# Altium PCB 004-H-01 SD data logger.PcbDoc
Units mm, origin at the board's own origin, x right, y up, seen from the top; angles counter-clockwise.
Board outline 101 x 61 mm, 2 copper layers (Top Layer, Bottom Layer), stack 1.621 mm thick; 91 components, 66 nets, 324 pads, 153 vias.
Unrouted connection lines stored in the file: 79.
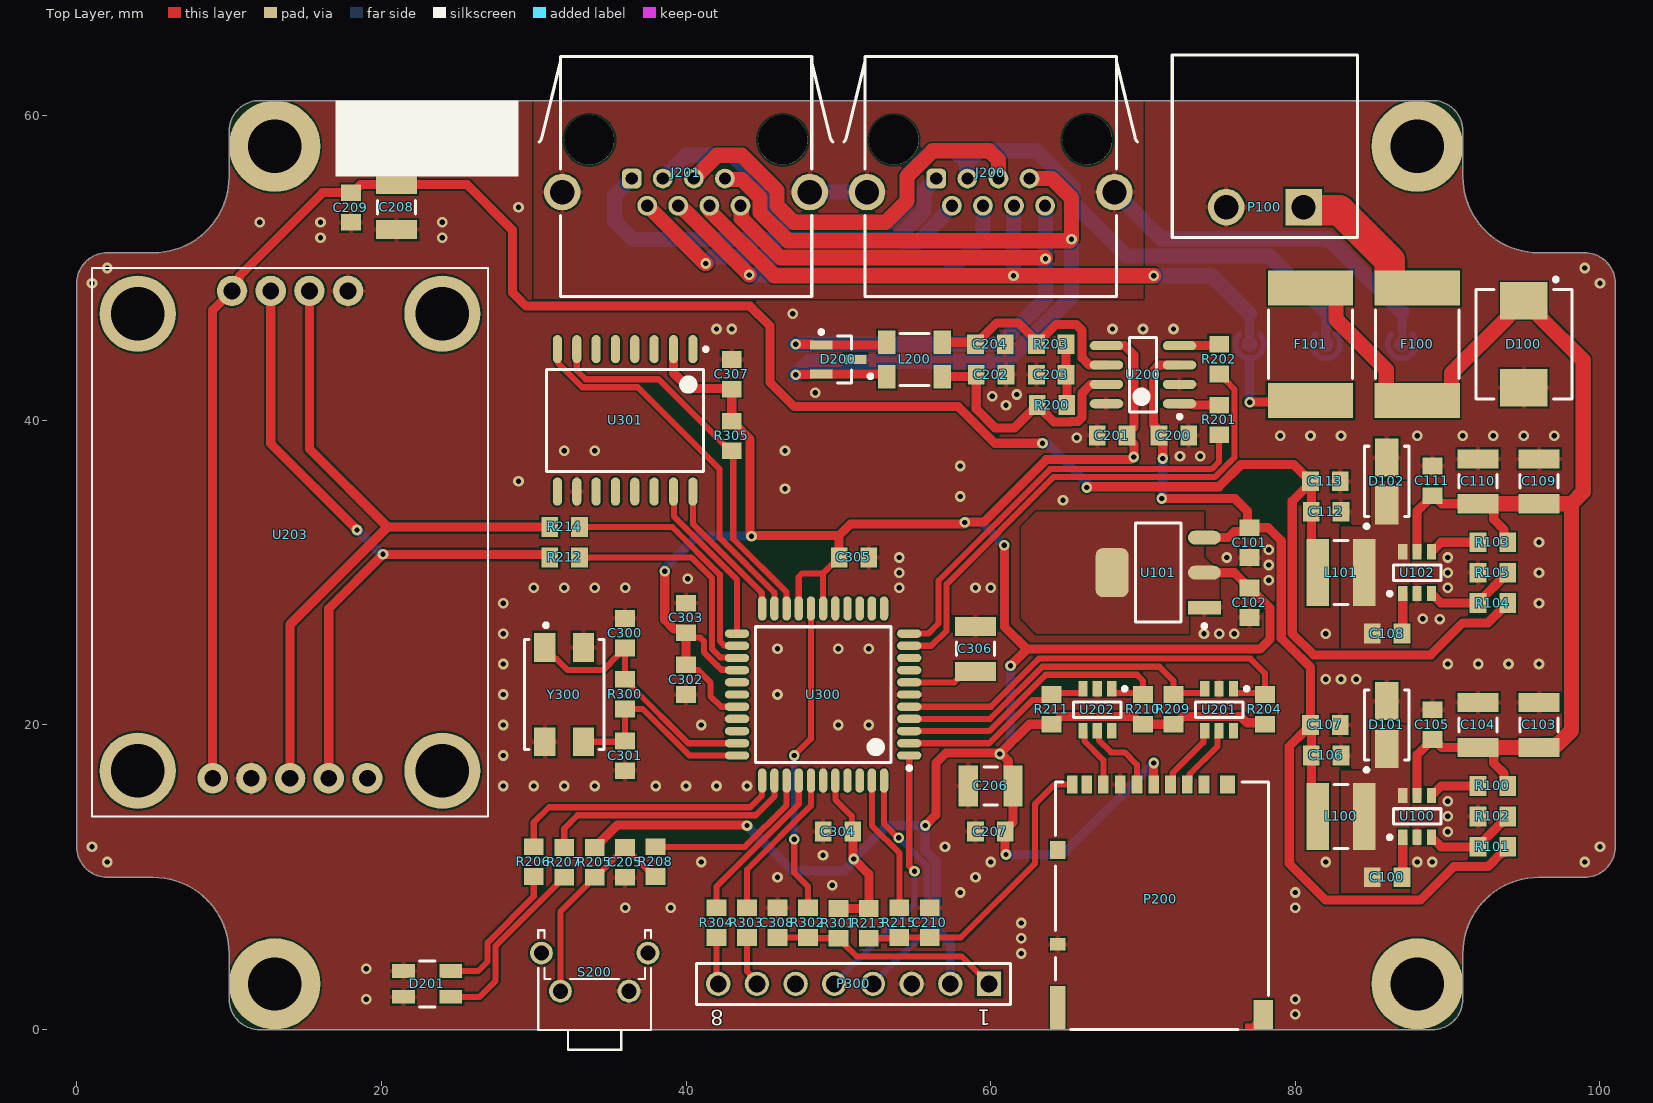
[diagram p0: Top Layer view]
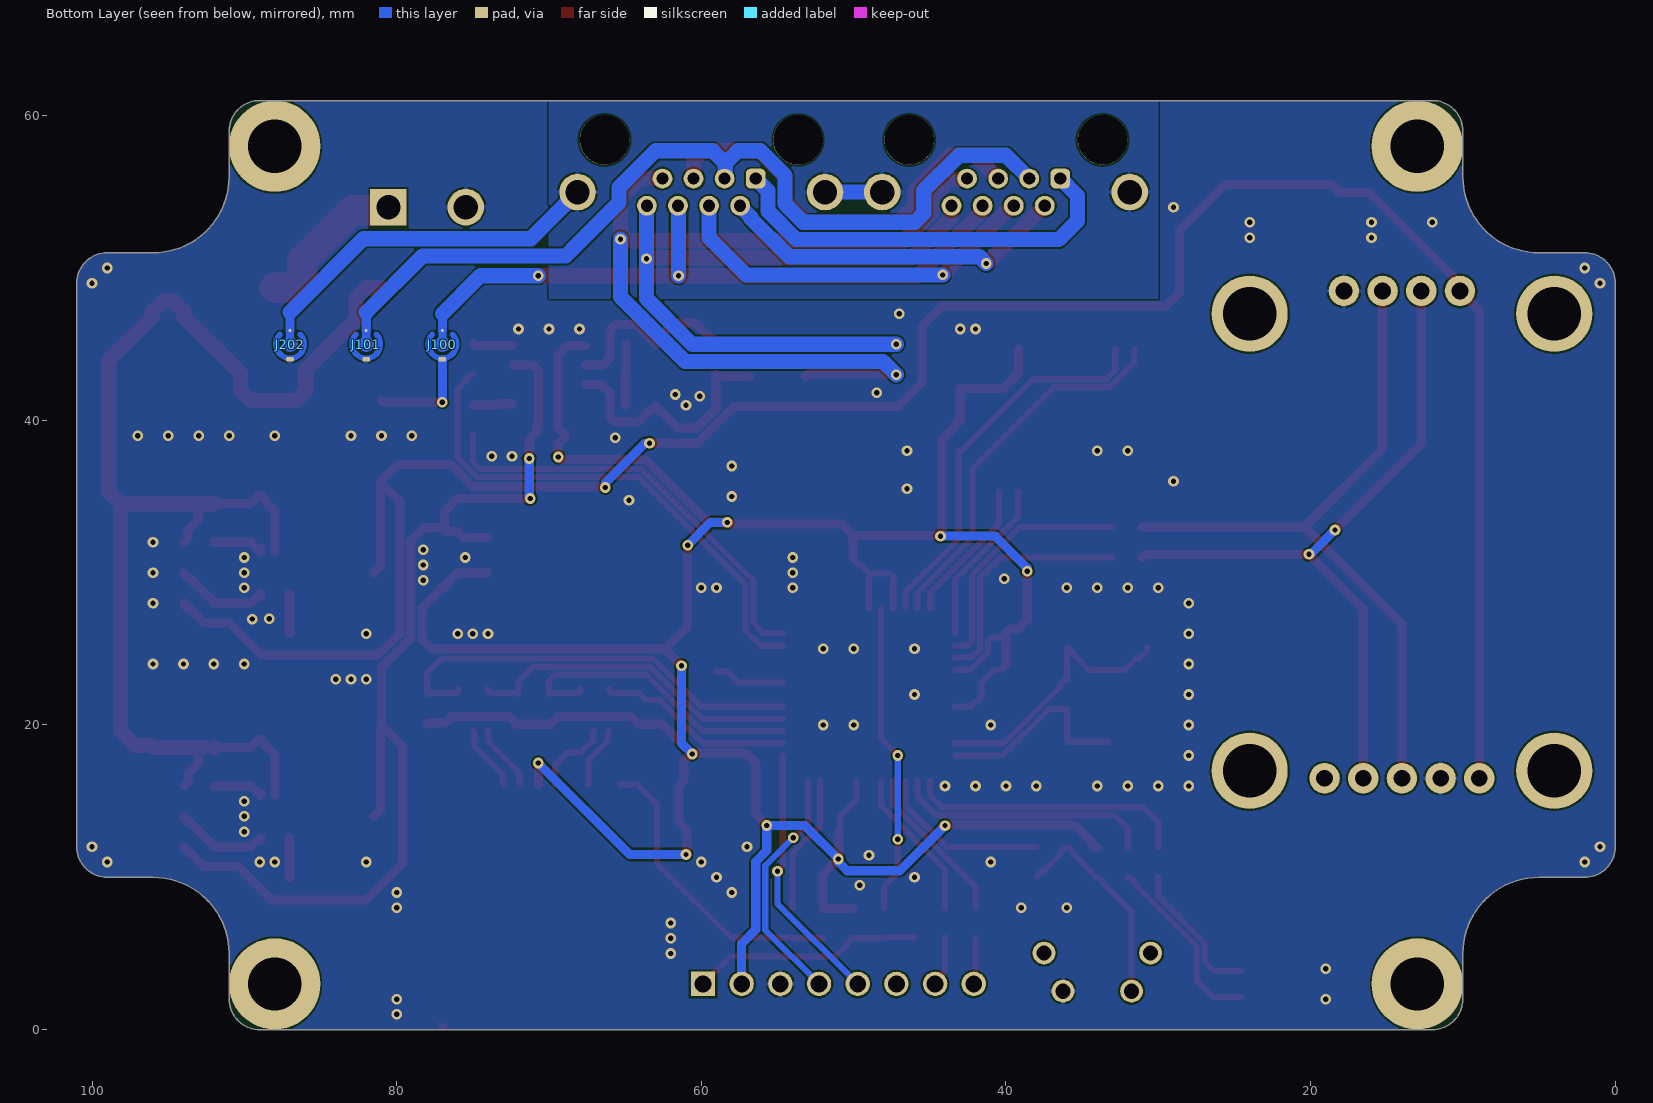
[diagram p1: Bottom Layer view, seen from below]
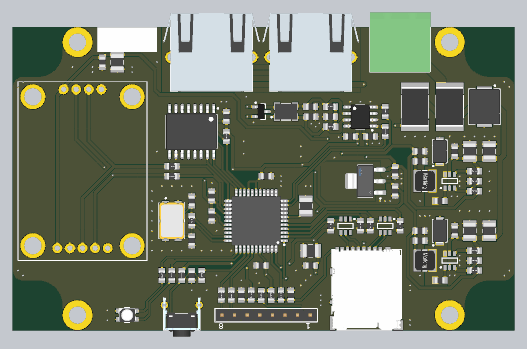
[diagram p2: 3D render of the assembled board from above, using the file's embedded part models]

## Layer stack, top to bottom
Top Solder: solder mask 0.0102, Solder Resist, Dk 3.5
Top Layer: signal copper 0.0356
Dielectric 1: dielectric 1.55, FR-4, Dk 4.8
Bottom Layer: signal copper 0.0356
Bottom Solder: solder mask 0.0102, Solder Resist, Dk 3.5

## Board outline
10,2 10,5 ccw(c5,5) 5,10 2,10 cw(c2,12) 0,12 0,49 cw(c2,49) 2,51 5,51 ccw(c5,56) 10,56 10,59 cw(c12,59) 12,61 89,61 cw(c89,59) 91,59 91,56 ccw(c96,56) 96,51 99,51 cw(c99,49) 101,49 101,12 cw(c99,12) 99,10 96,10 ccw(c96,5) 91,5 91,2 cw(c89,2) 89,0 12,0 cw(c12,2)

## Design rules (kind name [scope] priority, off if disabled: settings)
Clearance [All] p1: gap=0.127 ignorepadtopadclearanceinfootprint=FALSE
HoleSize [All] p1: absolutevalues=TRUE maxlimit=6.3 minlimit=0.3 maxpercent=80.000 minpercent=20.000
MinimumSolderMaskSliver [All] p1: minsoldermaskwidth=0.127
PolygonConnect PolygonConnect_HighPower [InPolygonClass('HIghPower')] p1: connectstyle=Direct reliefconductorwidth=0.254 reliefentries=4 polygonreliefangle="90 Angle" airgapwidth=0.254
PolygonConnect PolygonConnect_via [All vs IsVia] p2: connectstyle=Direct reliefconductorwidth=0.254 reliefentries=4 polygonreliefangle="90 Angle" airgapwidth=0.254
PolygonConnect [All] p3: connectstyle=Relief reliefconductorwidth=0.3 reliefentries=4 polygonreliefangle="90 Angle" airgapwidth=0.127
RoutingVias [All] p1: holewidth=0.35 width=0.7 viastyle="Through Hole" minholewidth=0.3 minwidth=0.6 maxholewidth=0.711 maxwidth=1.27
SilkToSilkClearance [All] p1 off: silktosilkclearance=0.254
SilkToSolderMaskClearance [IsPad] p1 off: minsilkscreentomaskgap=0.254 clearancetoexposedcopper=TRUE
SolderMaskExpansion SolderMaskExpansion_VIA [IsVia] p1: expansion=0.102 istentingtop=TRUE
SolderMaskExpansion [All] p2: expansion=0.102 istentingtop=FALSE
UnRoutedNet [All] p1: checkbadconnections=TRUE
Width [All] p1: maxlimit=5 minlimit=0.127 preferedwidth=0.2
25 further rules are at their usual default settings.

## Classes and differential pairs
polygon class HIghPower: REG_3v3 SW_5v SW_5Vsec
component class "U_system controller": C300 C301 C302 C303 C304 C305 C306 C307 C308 P300 R300 R301 R302 R303 R304 R305 U300 U301 Y300
component class U_interfaces: C200 C201 C202 C203 C204 C205 C206 C207 C208 C209 C210 D200 D201 J200 J201 J202 L200 P200 R200 R201 R202 R203 R204 R205 R206 R207 R208 R209 R210 R211 R212 R213 R214 R215 S200 U200 U201 U202 U203
component class "U_bias supply": C100 C101 C102 C103 C104 C105 C106 C107 C108 C109 C110 C111 C112 C113 D100 D101 D102 F100 F101 J100 J101 L100 L101 P100 P101 R100 R101 R102 R103 R104 R105 U100 U101 U102

## Components (designator, comment, footprint, x,y, rotation, side; value= is the part's Value field where it differs from the comment)
C100 "100nF, 100V" CAP_0805 86,10 r180 top
C101 "1uF, 16V" CAP_0805 77,32 r90 top
C102 "1uF, 16V" CAP_0805 77,28 r270 top
C103 "2.2uF, 100V" CAP_1210 96,20 r270 top
C104 "2.2uF, 100V" CAP_1210 92,20 r90 top
C105 "100nF, 100V" CAP_0805 89,20 r270 top
C106 "4.7uF, 16V" CAP_0805 82,18 r180 top
C107 "4.7uF, 16V" CAP_0805 82,20 r0 top
C108 "100nF, 100V" CAP_0805 86,26 r180 top
C109 "2.2uF, 100V" CAP_1210 96,36 r270 top
C110 "2.2uF, 100V" CAP_1210 92,36 r90 top
C111 "100nF, 100V" CAP_0805 89,36 r270 top
C112 "4.7uF, 16V" CAP_0805 82,34 r180 top
C113 "4.7uF, 16V" CAP_0805 82,36 r0 top
C200 "100nF, 100V" CAP_0805 72,39 r180 top
C201 "100nF, 100V" CAP_0805 68,39 r0 top
C202 "47pF, 100V" CAP_0805 60,43 r180 top
C203 "100nF, 100V" CAP_0805 64,43 r0 top
C204 "47pF, 100V" CAP_0805 60,45 r0 top
C205 "100nF, 100V" CAP_0805 36,11 r90 top
C206 "10uF, 16V" CAP_1210 60,16 r0 top
C207 "100nF, 100V" CAP_0805 60,13 r0 top
C208 "10uF, 16V" CAP_1210 21,54 r90 top
C209 "100nF, 100V" CAP_0805 18,54 r90 top
C210 "100nF, 100V" CAP_0805 56,7 r270 top
C300 "33pF, 100V" CAP_0805 36,26 r270 top
C301 "33pF, 100V" CAP_0805 36,18 r90 top
C302 "100nF, 100V" CAP_0805 40,23 r90 top
C303 "100nF, 100V" CAP_0805 40,27 r270 top
C304 "100nF, 100V" CAP_0805 50,13 r0 top
C305 "100nF, 100V" CAP_0805 51,31 r180 top
C306 "10uF, 16V" CAP_1210 59,25 r270 top
C307 "100nF, 100V" CAP_0805 43,43 r270 top
C308 "100nF, 100V" CAP_0805 46,7 r270 top
D100 "S8KC-13" DIODEDO-214AB 95,45 r270 top
D101 "SS110+" DIODEDO-214AC 86,20 r90 top
D102 "SS110+" DIODEDO-214AC 86,36 r90 top
D200 "PESD1CAN" SOT23-3N 50,44 r0 top
D201 "Red & Bright Green" WL-SBTW_3528 23,3 r0 top
F100 "PTC 300mA" PTC7451X12N 88,45 r270 top
F101 "PTC 300mA" PTC7451X12N 81,45 r90 top
J100 "Solder Jumper" SolderJumer 77,45 r90 bottom
J101 "Solder Jumper" SolderJumer 82,45 r90 bottom
J200 "Header Modular 8P8C Shielded" WE-615008140621 60,56 r180 top locked
J201 "Header Modular 8P8C Shielded" WE-615008140621 40,56 r180 top locked
J202 "Solder Jumper" SolderJumer 87,45 r90 bottom
L100 "100uH, 0.49A" WE-LQS_4025 83,14 r180 top
L101 "100uH, 0.49A" WE-LQS_4025 83,30 r180 top
L200 "5000Ohm" WE-CNSW_1812 55,44 r0 top
P100 "Header Pluggable 5.08mm 2p" WE-691313510002 78,58 r180 top locked
P200 "uSD Card" DM3AT-SF-PEJM5 74,15.5 r0 top
P300 "Header pin 2.54mm 8p" WE-61300811121 51,3 r180 top
R100 "100K" RES_0805 93,16 r0 top
R101 "100K" RES_0805 93,12 r0 top
R102 "18K" RES_0805 93,14 r0 top
R103 "100K" RES_0805 93,32 r0 top
R104 "100K" RES_0805 93,28 r0 top
R105 "18K" RES_0805 93,30 r0 top
R200 "15K" RES_0805 64,41 r180 top
R201 "470R" RES_0805 75,40 r270 top
R202 "470R" RES_0805 75,44 r270 top
R203 "15K" RES_0805 64,45 r0 top
R204 "10K" RES_0805 78,21 r270 top
R205 "10K" RES_0805 34,11 r90 top
R206 "68R" RES_0805 30,11 r270 top
R207 "68R" RES_0805 32,11 r90 top
R208 "1K0" RES_0805 38,11 r270 top
R209 "10K" RES_0805 72,21 r270 top
R210 "10K" RES_0805 70,21 r270 top
R211 "10K" RES_0805 64,21 r270 top
R212 "1K0" RES_0805 32,31 r180 top
R213 "10K" RES_0805 52,7 r90 top
R214 "1K0" RES_0805 32,33 r180 top
R215 "1K0" RES_0805 54,7 r270 top
R300 "1M0" RES_0805 36,22 r270 top
R301 "10K" RES_0805 50,7 r90 top
R302 "470R" RES_0805 48,7 r270 top
R303 "1K0" RES_0805 44,7 r270 top
R304 "1K0" RES_0805 42,7 r270 top
R305 "10K" RES_0805 43,39 r90 top
S200 "TactileSwitch" 4312560387x6 34,3.25 r0 top
U100 "LMR16006" SOT95P280X110-6N 88,14 r90 top
U101 "AZ1117EH-3.3TRG1" FP-SOT223-IPC_A 71,30 r180 top
U102 "LMR16006" SOT95P280X110-6N 88,30 r90 top
U200 "MCP2562" SOIC-8N 70,43 r180 top
U201 "EMIF01-10005W5" SOT95P280X110-6N 75,21 r270 top
U202 "EMIF01-10005W5" SOT95P280X110-6N 67,21 r270 top
U203 "GY-GPS6MV2" GY-GPS6MV2 14,50 r0 top
U300 "DSPIC33EP128GS804" TQFP80P1200X1200X120-44N 49,22 r180 top
U301 "S25FL256LAGMFI003" SOIC127P1030X265-16N 36,40 r270 top
Y300 "16MHz" WE-XTAL_12SMX 32,22 r270 top

## Footprints (in the part's own frame and the unit in brackets; to place one, negate y for a bottom-side part, rotate by r counter-clockwise, add the part's x,y. Pads: shape width x height; smd on the part's side, far side on the other; paste and mask are expansions set on the pad)
4312560387x6 [mm] "6x6mm right angle Tact Switch with ground terminal, THT version"
  round 1.5 hole 1: 1(-3.5,1.775) 2(-2.25,-0.725) 3(2.25,-0.725) 4(3.5,1.775)
  silkscreen extent -3.7,-4.57 3.7,3.27, body extent -4.2,-4.58 4.2,3.27, height 7.25
CAP_0805 [mm] "Ceramic Capacitor, SMT, body size 2x1.25mm"
  rect 1.1x1.3 smd: 1(-1,0) 2(0.95,0)
  body extent -1,-0.62 1,0.63, height 0.8
CAP_1210 [mm] "Ceramic Capacitor, SMT, body size 3.2x2.5mm"
  rect 1.25x2.7 smd: 1(-1.475,0) 2(1.475,0)
  silkscreen extent -0.45,-1.25 0.45,1.25, body extent -1.6,-1.25 1.6,1.25, height 1.6
DIODEDO-214AB [mm] "Molded Diode, 2-Leads, Body 6.86x5.91mm, IPC Medium Density"
  rect 2.45x3.1 smd: 1(-2.85,0) 2(2.85,0)
  silkscreen extent -4.37,-3.15 3.6,3.15, body extent -3.77,-3.11 3.77,3.11, height 2.5
DIODEDO-214AC [mm] "Molded Diode, 2-Leads, Body 4.30x2.63mm, IPC Medium Density"
  rect 2.5x1.55 smd: 1(-1.575,0) 2(1.575,0)
  silkscreen extent -3.07,-1.45 2.3,1.45, body extent -2.52,-1.45 2.52,1.45, height 2.62
DM3AT-SF-PEJM5 [mm] "Memory Socket Micro SD card"
  rect 1x2.8 smd: 0(-9.6,-14.05)
  rect 1x1.2 smd: 0(-9.6,-3.7) 0(1.55,0.6)
  rect 1.3x1.9 smd: 0(3.9,-14.5)
  rect 0.7x1.2 smd: 1(0,0.6) 2(-1.1,0.6) 3(-2.2,0.6) 4(-3.3,0.6) 5(-4.4,0.6) 6(-5.5,0.6) 7(-6.6,0.6) 8(-7.7,0.6) 9(-8.65,0.6)
  rect 1x0.8 smd: 10(-9.6,-9.9)
  Top Layer region: 3.25,-15.45 2.7,-15.45 2.7,-15.1 3.1,-15.1 3.25,-14.95
  silkscreen extent -9.75,-15.5 4.25,0.75, body extent -9.67,-15.4 4.17,0.75, height 1.68
FP-SOT223-IPC_A [mm]
  rect 2.16x0.912 smd paste+0 mask+0: 1(-3.026,2.3)
  rrect100% 2.16x0.912 smd paste+0 mask+0: 2(-3.026,0) 3(-3.026,-2.3)
  rrect42% 2.16x3.212 smd paste+0 mask+0: 4(3.026,0)
  silkscreen extent -3.15,-3.25 1.5,3.62, body extent -4.61,-3.75 4.61,3.75, height 0.25
GY-GPS6MV2 [mm] "GPS module"
  round 5 hole 3.5: 0(-10,-33) 0(-10,-3) 0(10,-33) 0(10,-3)
  round 2 hole 1.1: 1(-5.08,-33.5) 1(-3.81,-1.5) 2(-1.27,-1.5) 2(2.54,-33.5) 3(0,-33.5) 3(1.27,-1.5) 4(-2.54,-33.5) 4(3.81,-1.5) 5(5.08,-33.5)
  silkscreen extent -13,-36 13,0
PTC7451X12N [mm] "Chip PTC, 2-Leads, Body 7.36x5.12mm, IPC Medium Density"
  rect 2.3x5.6 smd: 1(-3.7,0) 2(3.7,0)
  silkscreen extent -2.25,-2.75 2.25,2.75, body extent -3.99,-2.72 3.99,2.72, height 1.15
RES_0805 [mm] "Thick Film Resistors, SMT, body size 2x1.25mm"
  rect 1.1x1.3 smd: 1(-1,0) 2(0.95,0)
  body extent -1,-0.62 1,0.63, height 0.6
SOIC127P1030X265-16N [mm] "SOIC, 16-Leads, Body 10.30x7.50mm, Pitch 1.27mm, IPC Medium Density"
  oval 1.85x0.6 smd: 1(-4.675,4.445) 2(-4.675,3.175) 3(-4.675,1.905) 4(-4.675,0.635) 5(-4.675,-0.635) 6(-4.675,-1.905) 7(-4.675,-3.175) 8(-4.675,-4.445) 9(4.675,-4.445) 10(4.675,-3.175) 11(4.675,-1.905) 12(4.675,-0.635) 13(4.675,0.635) 14(4.675,1.905) 15(4.675,3.175) 16(4.675,4.445)
  silkscreen extent -4.8,-5.15 3.35,5.42, body extent -5.15,-5.15 5.15,5.15, height 2.65
SOIC-8N [mm] "SOIC, 8-Leads, Body 4.9x3.9mm (max), Pitch 1.27mm, IPC Medium Density"
  oval 2.2x0.6 smd: 1(-2.4,1.905) 2(-2.4,0.635) 3(-2.4,-0.635) 4(-2.4,-1.905) 5(2.4,-1.905) 6(2.4,-0.635) 7(2.4,0.635) 8(2.4,1.905)
  silkscreen extent -2.53,-2.45 0.9,2.88, body extent -3,-2.45 3,2.45, height 1.75
SolderJumer [mm] "Solder jumper open"
  round 0.2 smd paste+0 mask+0: 1(0.9,0)
  rrect50% 0.3x0.5 smd paste+0 mask+0: 2(-1,0)
  Top Layer region: 0.752,-0.803 0.258,-1.069 -0.304,-1.057 -0.786,-0.769 -1.064,-0.281 -1.064,0.281 -0.786,0.769 -0.304,1.057 0.258,1.069 0.752,0.803 0.752,0.803 0.8,0.726 0.803,0.636 0.76,0.556 0.684,0.508 0.593,0.504 0.513,0.547 0.513,0.547 0.176,0.729 -0.207,0.721 -0.536,0.525 -0.725,0.192 -0.725,-0.192 -0.536,-0.525 -0.207,-0.721 0.176,-0.729 0.513,-0.547 0.513,-0.547 0.593,-0.504 0.684,-0.508 0.76,-0.556 0.803,-0.636 0.8,-0.726 0.752,-0.803
  Top Layer region: 0.433,-0.25 0.25,-0.433 0,-0.5 -0.25,-0.433 -0.433,-0.25 -0.5,0 -0.433,0.25 -0.25,0.433 0,0.5 0.25,0.433 0.433,0.25 0.433,0.25 0.852,0.25 0.852,0.25 0.961,0.225 1.048,0.156 1.096,0.056 1.096,-0.056 1.048,-0.156 0.961,-0.225 0.852,-0.25 0.852,-0.25
SOT23-3N [mm] "SOT23, 3-Leads, Body 3.1x3.0mm (max), Pitch 0.95mm, IPC Medium Density"
  rect 1.45x0.6 smd: 1(-1.125,0.95) 2(-1.125,-0.95) 3(1.125,0)
  silkscreen extent -1.25,-1.55 0.85,1.92, body extent -1.25,-1.55 1.25,1.55, height 1.45
SOT95P280X110-6N [mm] "SOT23, 6-Leads, Body 2.90x2.80mm, Pitch 0.95mm, IPC Medium Density"
  rect 1x0.6 smd: 1(-1.375,0.95) 2(-1.375,0) 3(-1.375,-0.95) 4(1.375,-0.95) 5(1.375,0) 6(1.375,0.95)
  silkscreen extent -1.5,-1.55 0.5,1.92, body extent -0.88,-1.52 0.87,1.53, height 1.1
TQFP80P1200X1200X120-44N [mm] "TQFP, 44-Leads, Body 12.0x12.0mm (max), Pitch 0.80mm, IPC Medium Density"
  oval 1.6x0.55 smd: 1(-5.65,4) 2(-5.65,3.2) 3(-5.65,2.4) 4(-5.65,1.6) 5(-5.65,0.8) 6(-5.65,0) 7(-5.65,-0.8) 8(-5.65,-1.6) 9(-5.65,-2.4) 10(-5.65,-3.2) 11(-5.65,-4) 23(5.65,-4) 24(5.65,-3.2) 25(5.65,-2.4) 26(5.65,-1.6) 27(5.65,-0.8) 28(5.65,0) 29(5.65,0.8) 30(5.65,1.6) 31(5.65,2.4) 32(5.65,3.2) 33(5.65,4)
  oval 0.55x1.6 smd: 12(-4,-5.65) 13(-3.2,-5.65) 14(-2.4,-5.65) 15(-1.6,-5.65) 16(-0.8,-5.65) 17(0,-5.65) 18(0.8,-5.65) 19(1.6,-5.65) 20(2.4,-5.65) 21(3.2,-5.65) 22(4,-5.65) 34(4,5.65) 35(3.2,5.65) 36(2.4,5.65) 37(1.6,5.65) 38(0.8,5.65) 39(0,5.65) 40(-0.8,5.65) 41(-1.6,5.65) 42(-2.4,5.65) 43(-3.2,5.65) 44(-4,5.65)
  silkscreen extent -5.77,-4.45 4.45,4.95, body extent -6.01,-6.01 6.01,6.01, height 1.35
WE-61300811121 [mm] "Pin Header, pitch 2.54 mm, THT, Vertical, single row, 8p"
  rect 1.6x1.6 hole 1.1: 1(-8.89,0)
  round 1.6 hole 1.1: 2(-6.35,0) 3(-3.81,0) 4(-1.27,0) 5(1.27,0) 6(3.81,0) 7(6.35,0) 8(8.89,0)
  silkscreen extent -10.31,-1.35 10.31,1.35, body extent -10.16,-1.27 10.16,1.27, height 8.57
WE-615008140621 [mm] "Modular Jack Horizontal Shielded with EMI Panel Finger 8P8C Tab Up"
  rrect50% 1.3x1.3 hole 0.8: 1(3.57,0.125)
  round 1.3 hole 0.8: 2(2.55,1.905) 3(1.53,0.125) 4(0.51,1.905) 5(-0.51,0.125) 6(-1.53,1.905) 7(-2.55,0.125) 8(-3.57,1.905)
  round 3.25 hole 3.25 unplated: MH1(-6.35,-2.415) MH2(6.35,-2.415)
  round 2.4 hole 1.6: Shell(-8.125,1.015) Shell(8.125,1.015)
  silkscreen extent -9.64,-7.88 9.64,7.87, body extent -9.75,-7.88 9.75,7.97, height 14.82
WE-691313510002 [mm] "5,08mm - PCB Headers - Horizontal - Closed ends - 02p"
  rect 2.4x2.4 hole 1.6: 1(-2.54,4)
  round 2.4 hole 1.6: 2(2.54,4)
  silkscreen extent -6.08,-6 6.08,6, body extent -6.08,-6 6.08,6, height 8.55
WE-CNSW_1812 [mm] "SMT Common Mode Line Filter, 4-leads, body 4.5x3.2mm"
  rect 1.15x1.55 smd: 1(-1.825,-1.125) 2(1.825,-1.125) 3(1.825,1.125) 4(-1.825,1.125)
  silkscreen extent -3.02,-1.7 0.95,1.7, body extent -2.25,-1.6 2.25,1.6, height 2.84
WE-LQS_4025 [mm] "SMD Power Inductor, 2-Leads, body 4x4mm"
  rect 1.5x4.4 smd: 1(-1.525,0) 2(1.525,0)
  silkscreen extent -0.45,-2.1 0.45,2.1, body extent -2,-2 2,2, height 2.15
WE-XTAL_12SMX [mm] "Quartz Crystal, size 12SMX, body 7.5x5.2mm"
  rect 1.9x1.4 smd: 1(-3.1,-1.27) 2(-3.1,1.27) 3(3.1,1.27) 4(3.1,-1.27)
  silkscreen extent -4.67,-2.6 3.6,2.6, body extent -3.75,-2.6 3.75,2.6, height 1.1
WL-SBTW_3528 [mm] "SMD Bi-color TOP LED, body 3.2x2.8mm"
  rect 1.5x0.9 smd: 1(1.55,0.85) 2(1.55,-0.85) 3(-1.55,0.85) 4(-1.55,-0.85)
  silkscreen extent -0.5,-1.5 0.5,1.5, body extent -1.75,-1.4 1.75,1.4, height 1.9

## Part data
C100 C105 C108 C111 C200 C201 C203 C205 C207 C209 C210 C302 C303 C304 C305 C307 C308: library part CAP_0805_100nF_100V, "WCAP-CSGP Multilayer Ceramic Chip Capacitor, General Purpose, size 0805, X7R, 100nF, 100V", Capacitance=100nF, Capacitance Tolerance=+/-10%, Isolation Resistance=>=1GOhm, Manufacturer="Wurth Elektronik", Manufacturer Part Number=885012207128, Operating Temperature="-55 to +125degC", Rated Voltage=100VDC, Supplier Part Number 1=2812440, Ceramic Type=X7R, ComponentLink1Description=Manufacturer, ComponentLink1URL=http://www.we-online.de, ComponentLink2Description=Datasheet, ComponentLink2URL=https://www.we-online.com/catalog/datasheet/885012207128.pdf, Dissipation Factor=#NAME?, Height=1.25mm, Mounting Technology=SMT, Packaging="Tape and Reel", Published Date="May 2020", Size=0805, Supplier 1=Farnell, Technical Reference=X7R0805104K100DFCT10000
C101 C102: library part CAP_0805_1uF_16V, "WCAP-CSGP Multilayer Ceramic Chip Capacitor, General Purpose, size 0805, X7R, 1uF, 16V", Capacitance=1uF, Capacitance Tolerance=+/-10%, Isolation Resistance=>=0.5GOhm, Manufacturer="Wurth Elektronik", Manufacturer Part Number=885012207051, Operating Temperature="-55 to +125degC", Rated Voltage=16VDC, Supplier Part Number 1=2534058, Ceramic Type=X7R, ComponentLink1Description=Manufacturer, ComponentLink1URL=http://www.we-online.de, ComponentLink2Description=Datasheet, ComponentLink2URL=https://www.we-online.com/catalog/datasheet/885012207051.pdf, Dissipation Factor=#NAME?, Height=1.25mm, Mounting Technology=SMT, Packaging="Tape and Reel", Published Date="May 2020", Size=0805, Supplier 1=Farnell, Technical Reference=X7R0805105K016DFCT10000
C103 C104 C109 C110: library part CAP_1210_2.2uF_100V, "WCAP-CSGP Multilayer Ceramic Chip Capacitor, General Purpose, size 1210, X7R, 2.2uF, 100V", Capacitance=2.2uF, Capacitance Tolerance=+/-10%, Isolation Resistance=>=0.05GOhm, Manufacturer="Wurth Elektronik", Manufacturer Part Number=885012209071, Operating Temperature="-55 to +125degC", Rated Voltage=100VDC, Ceramic Type=X7R, ComponentLink1Description=Manufacturer, ComponentLink1URL=http://www.we-online.de, ComponentLink2Description=Datasheet, ComponentLink2URL=https://www.we-online.com/catalog/datasheet/885012209071.pdf, Dissipation Factor=#NAME?, Height=2.5mm, Mounting Technology=SMT, Packaging="Tape and Reel", Published Date="May 2020", Size=1210, Technical Reference=X7R1210225K100DFCT10000
C106 C107 C112 C113: library part CAP_0805_4.7uF_16V, "WCAP-CSGP Multilayer Ceramic Chip Capacitor, General Purpose, size 0805, X7R, 4.7uF, 16V", Capacitance=4.7uF, Capacitance Tolerance=+/-10%, Isolation Resistance=>=0.02GOhm, Manufacturer="Wurth Elektronik", Manufacturer Part Number=885012207053, Operating Temperature="-55 to +125degC", Rated Voltage=16VDC, Supplier Part Number 1=2495191, Ceramic Type=X7R, ComponentLink1Description=Manufacturer, ComponentLink1URL=http://www.we-online.de, ComponentLink2Description=Datasheet, ComponentLink2URL=https://www.we-online.com/catalog/datasheet/885012207053.pdf, Dissipation Factor=#NAME?, Height=1.25mm, Mounting Technology=SMT, Packaging="Tape and Reel", Published Date="May 2020", Size=0805, Supplier 1=Farnell, Technical Reference=X7R0805475K016DFCT10000
C202 C204: library part CAP_0805_47pF_100V, "WCAP-CSGP Multilayer Ceramic Chip Capacitor, General Purpose, size 0805, NP0, 47pF, 100V", Capacitance=47pF, Capacitance Tolerance=+/-5%, Isolation Resistance=>=10GOhm, Manufacturer="Wurth Elektronik", Manufacturer Part Number=885012007080, Operating Temperature="-55 to +125degC", Rated Voltage=100VDC, Supplier Part Number 1=2812160, Ceramic Type=NP0, ComponentLink1Description=Manufacturer, ComponentLink1URL=http://www.we-online.de, ComponentLink2Description=Datasheet, ComponentLink2URL=https://www.we-online.com/catalog/datasheet/885012007080.pdf, Dissipation Factor=Q>=1000, Height=0.6mm, Mounting Technology=SMT, Packaging="Tape and Reel", Published Date="May 2020", Size=0805, Supplier 1=Farnell, Technical Reference=NP00805470J100DFCT10000
C206 C208 C306: library part CAP_1210_10uF_16V, "WCAP-CSGP Multilayer Ceramic Chip Capacitor, General Purpose, size 1210, X7R, 10uF, 16V", Capacitance=10uF, Capacitance Tolerance=+/-10%, Isolation Resistance=>=0.1GOhm, Manufacturer="Wurth Elektronik", Manufacturer Part Number=885012209014, Operating Temperature="-55 to +125degC", Rated Voltage=16VDC, Ceramic Type=X7R, ComponentLink1Description=Manufacturer, ComponentLink1URL=http://www.we-online.de, ComponentLink2Description=Datasheet, ComponentLink2URL=https://www.we-online.com/catalog/datasheet/885012209014.pdf, Dissipation Factor=#NAME?, Height=2mm, Mounting Technology=SMT, Packaging="Tape and Reel", Published Date="May 2020", Size=1210, Technical Reference=X7R1210106K016DFCT10000
C300 C301: library part CAP_0805_33pF_100V, "WCAP-CSGP Multilayer Ceramic Chip Capacitor, General Purpose, size 0805, NP0, 33pF, 100V", Capacitance=33pF, Capacitance Tolerance=+/-5%, Isolation Resistance=>=10GOhm, Manufacturer="Wurth Elektronik", Manufacturer Part Number=885012007079, Operating Temperature="-55 to +125degC", Rated Voltage=100VDC, Ceramic Type=NP0, ComponentLink1Description=Manufacturer, ComponentLink1URL=http://www.we-online.de, ComponentLink2Description=Datasheet, ComponentLink2URL=https://www.we-online.com/catalog/datasheet/885012007079.pdf, Dissipation Factor=Q>=1000, Height=0.6mm, Mounting Technology=SMT, Packaging="Tape and Reel", Published Date="May 2020", Size=0805, Technical Reference=NP00805330J100DFCT10000
D100: library part "Diode S8KC-13", "Diode", Manufacturer="Diodes inc", Supplier Part Number 1=3127431, Manufacturer Part No=S8KC-13, Supplier 1=Farnell
D101 D102: library part "Diode Schottky SS110+", "Diode Schottky", Manufacturer=Multicomp, Supplier Part Number 1=4085140, Manufacturer Part No=SS110+, Supplier 1=Farnell
D200: "ESD Protection Device, TVS, 70 V, SOT-23, 3 Pins", Manufacturer=NXP, Supplier Part Number 1=1510703, Manufacturer Part No=PESD1CAN, Supplier 1=Farnell
D201: library part "LED bicolor, Red and Green", "WL-SBTW SMD Bi-color TOP LED Waterclear, Red & Bright Green, 120degC", Forward Voltage=2V, Operating Temperature="-40 to +85degC", Part Number=150141RV73100, Supplier Part Number 1=2322113, Chip Technology=AlInGaP, ComponentLink1Description=Manufacturer, ComponentLink1URL=http://www.we-online.de, ComponentLink2Description=Datasheet, ComponentLink2URL=https://katalog.we-online.de/led/datasheet/150141RV73100.pdf, Dominant Wavelength="625nm@Red, 570nm@Bright Green", Emitting Color="Red & Bright Green", Luminous Intensity="250mcd@Red, 60mcd@Bright Green", Mounting Technology=SMT, Packaging="Tape and Reel", Peak Wavelength="630nm@Red, 572nm@Bright Green", Published Date="June 2019", Publisher="Wurth Elektronik", Size=3528, Supplier 1=Farnell, Viewing Angle=120deg
F100 F101: "Fuse", Manufacturer="Multicomp Pro", Manufacturer Part No=MC33189, Supplier Part Number 1=1800748, Supplier 1=Farnell
J100 J101 J202: library part SolderJumper, "Solder jumper open", Manufacturer=-, Manufacturer Part No=-
J200 J201: "WR-MJ Modular Jack THT Horizontal Shielded with EMI Panel Finger 8P8C Tab Up", Contact Resistance=20mOhm, Insulation Resistance=500MOhm, Manufacturer="Wurth Elektronik", Manufacturer Part Number=615008140621, Operating Temperature="-40 to +85degC", Rated Current=1.5A, Supplier Part Number 1=1841173, Withstanding Voltage=1000VAC, Working Voltage=120VAC, ComponentLink1Description=Manufacturer, ComponentLink1URL=http://www.we-online.de, ComponentLink2Description=Datasheet, ComponentLink2URL=https://katalog.we-online.com/em/datasheet/615008140621.pdf, Mounting Technology=THT, Packaging=Tray, Published Date="September 2020", Supplier 1=Farnell, Type=Horizontal, xPxC=8P8C
L100 L101: library part "Inductor 100uH 0.49A 1043mOhm", "WE-LQS SMT Power Inductor, size 4025, 100uH, 0.49A", DC Resistance=1043mOhm, Inductance=100uH, Manufacturer="Wurth Elektronik", Manufacturer Part Number=74404043101A, Operating Temperature="-40 to +125degC", Rated Current=0.49A, Saturation Current=0.29A, Self Resonant Frequency=11MHz, Supplier Part Number 1=2749073, ComponentLink1Description=Manufacturer, ComponentLink1URL=http://www.we-online.de, ComponentLink2Description=Datasheet, ComponentLink2URL=https://www.we-online.com/catalog/datasheet/74404043101A.pdf, Mounting Technology=SMT, Packaging="Tape and Reel", Published Date="May 2020", Size=4025, Supplier 1=Farnell
L200: library part CommonModeChoke, "WE-CNSW SMT Common Mode Line Filter, size 1812, 5000Ohm, 0.45A, 60V", DC Resistance max.=0.8Ohm, Insulation Test Voltage=125VAC, Manufacturer="Wurth Elektronik", Manufacturer Part Number=744235110, Operating Temperature="-40 to +125degC", Rated Current=0.45A, Rated Voltage=60V, Supplier Part Number 1=2249869, ComponentLink1Description=Manufacturer, ComponentLink1URL=http://www.we-online.de, ComponentLink2Description=Datasheet, ComponentLink2URL=https://www.we-online.com/catalog/datasheet/744235110.pdf, Impedance=5000Ohm, Impedance Test Condition=100MHz, Mounting Technology=SMT, Packaging="Tape and Reel", Published Date="April 2020", Size=1812, Supplier 1=Farnell, Winding Style=bifiliar
P100: "WR-TBL Serie 313 Close Horizontal PCB Header, Pluggable, pitch 5.08mm, 2p", Operating Temperature="-40 to +105degC", Part Number=691313510002, Rated Current [UL]=20A, Supplier Part Number 1=1641993, Working Voltage [UL]=300VAC, Application=Pluggable, Compliance=RoHS, ComponentLink1Description=Manufacturer, ComponentLink1URL=http://www.we-online.de, ComponentLink2Description=Datasheet, ComponentLink2URL=https://katalog.we-online.de/em/datasheet/691313510002.pdf, Modularity=No, Mounting Technology=THT, Packaging=Box, PCB/Cable/Panel=PCB, Pin Number=2, Pitch=5.08mm, Published Date="October 2019", Publisher="Wurth Elektronik", Supplier 1=Farnell, Type=Horizontal
P200: library part "uSD slot", "SD slot connector with card detect", Manufacturer=Hirose, Manufacturer Part No=DM3AT-SF-PEJM5, Supplier Part Number 1=2427719, Supplier 1=Farnell
P300: "WR-PHD Pin Header, THT, pitch 2.54mm, Single Row, Vertical, 8p", Contact Resistance=20mOhm, Manufacturer="Wurth Elektronik", Manufacturer Part Number=61300811121, Operating Temperature="-40 to +105degC", Rated Current=3A, Supplier Part Number 1=2356160, Withstanding Voltage=500VAC, Working Voltage=250VAC, ComponentLink1Description=Manufacturer, ComponentLink1URL=http://www.we-online.de, ComponentLink2Description=Datasheet, ComponentLink2URL=https://www.we-online.com/catalog/datasheet/61300811121.pdf, Gender="Pin Header", Mounting Technology=THT, Orientation=Vertical, Packaging=Bag, Pin Number=8, Pitch=2.54mm, Published Date="May 2020", Row Number=Single, Supplier 1=Farnell
R100 R101 R103 R104: library part RES_0805_100K, "Thick Film Resistor, size 0805, 1%", Operating Temperature="-55 to +155degC", Rated Power=0.125W, Resistance Tolerance=+/-1%, Height=0.6mm, Length=2mm, Mounting Technology=SMT, Packaging="Tape and Reel", Resistance=100K, Size=0805, Width=1.25mm
R102 R105: library part RES_0805_18K, "Thick Film Resistor, size 0805, 1%", Operating Temperature="-55 to +155degC", Rated Power=0.125W, Resistance Tolerance=+/-1%, Height=0.6mm, Length=2mm, Mounting Technology=SMT, Packaging="Tape and Reel", Resistance=18K, Size=0805, Width=1.25mm
R200 R203: library part RES_0805_15K, "Thick Film Resistor, size 0805, 1%", Operating Temperature="-55 to +155degC", Rated Power=0.125W, Resistance Tolerance=+/-1%, Height=0.6mm, Length=2mm, Mounting Technology=SMT, Packaging="Tape and Reel", Resistance=15K, Size=0805, Width=1.25mm
R201 R202 R302: library part RES_0805_470R, "Thick Film Resistor, size 0805, 1%", Operating Temperature="-55 to +155degC", Rated Power=0.125W, Resistance Tolerance=+/-1%, Height=0.6mm, Length=2mm, Mounting Technology=SMT, Packaging="Tape and Reel", Resistance=470R, Size=0805, Width=1.25mm
R204 R205 R209 R210 R211 R213 R301 R305: library part RES_0805_10K, "Thick Film Resistor, size 0805, 1%", Operating Temperature="-55 to +155degC", Rated Power=0.125W, Resistance Tolerance=+/-1%, Height=0.6mm, Length=2mm, Mounting Technology=SMT, Packaging="Tape and Reel", Resistance=10K, Size=0805, Width=1.25mm
R206 R207: library part RES_0805_68R, "Thick Film Resistor, size 0805, 1%", Operating Temperature="-55 to +155degC", Rated Power=0.125W, Resistance Tolerance=+/-1%, Height=0.6mm, Length=2mm, Mounting Technology=SMT, Packaging="Tape and Reel", Resistance=68R, Size=0805, Width=1.25mm
R208 R212 R214 R215 R303 R304: library part RES_0805_1K0, "Thick Film Resistor, size 0805, 1%", Operating Temperature="-55 to +155degC", Rated Power=0.125W, Resistance Tolerance=+/-1%, Height=0.6mm, Length=2mm, Mounting Technology=SMT, Packaging="Tape and Reel", Resistance=1K0, Size=0805, Width=1.25mm
R300: library part RES_0805_1M0, "Thick Film Resistor, size 0805, 1%", Operating Temperature="-55 to +155degC", Rated Power=0.125W, Resistance Tolerance=+/-1%, Height=0.6mm, Length=2mm, Mounting Technology=SMT, Packaging="Tape and Reel", Resistance=1M0, Size=0805, Width=1.25mm
S200: "WS-TATU THT Tact Switch 6x6mm Right Angled Type with ground terminal, height 3.85mm, 160gf", Operating Temperature="-40 to +85degC", Part Number=431256038716, Rated Current=50mA, Rated Voltage=12VDC, ComponentLink1Description=Manufacturer, ComponentLink1URL=http://www.we-online.de, ComponentLink2Description=Datasheet, ComponentLink2URL=https://katalog.we-online.com/em/datasheet/431256038716.pdf, Contact Material="Stainless Steel", Contact Plating=Silver, Height=3.85mm, Mounting Technology=THT, Operation Force=160gf, Packaging=Bulk, Published Date="September 2019", Publisher="Wurth Elektronik", Terminal Material="Copper Alloy", Terminal Plating=Silver, Washable=No
U100 U102: "DC-DC Switching Buck (Step Down) Regulator, Adjustable, 4V-60Vin, 800mV-55Vout, 600mAout, TSOT-23-6", Manufacturer="Texas Instruments", Manufacturer Part No=LMR16006XDDCT, Supplier Part Number 1=3121632, Supplier 1=Farnell
U101: "IC REG LINEAR 3.3V 1A SOT223", Case/Package=TO-261-4, Dropout Voltage=1.1V, Manufacturer="Diodes Inc", Max Input Voltage=13V, Max Operating Temperature=125°C, Max Output Current=1A, Min Operating Temperature=-40°C, Operating Supply Current=3.5mA, Output Voltage=3.3V, Package Quantity=4000, Power Supply Rejection Ratio (PSRR)=70dB, Reference Voltage=1.262V, Accuracy=1%, Contact Plating=Tin, Lead Free="Lead Free", Manufacturer Part Number=AZ1117EH-3.3TRG1, Mount="Surface Mount", Number of Outputs=1, Number of Pins=3, Number of Regulators=1, Output Current=1A, Output Type=Fixed, Packaging="Tape and Reel", Polarity=Positive, Quiescent Current=3.5mA, Weight=0.000282oz
U200: "CAN Bus, Transceiver, CAN, LIN, 1, 1, 4.5 V, 5.5 V, SOIC", Manufacturer=Microchip, Manufacturer Part No=MCP2562-E/SN, Supplier Part Number 1=2362839, Supplier 1=Farnell
U201 U202: "2 Line EMI Filter with ESDProtection", Manufacturer="ST Microelectronics", Supplier Part Number 1=2629722, Manufacturer Part No=EMIF01-10005W5, Supplier 1=Farnell
U203: "GPS module", Manufacturer=NEO, Manufacturer Part No=GY-GPS6MV2
U300: "16-Bit Digital Signal Controllers fo  r Digital Power Applications with   Interconnected High-Speed PWM, ADC, PGA and Comparators", Manufacturer=Microchip, Manufacturer Part No=DSPIC33EP128GS804-I/PT, Supplier Part Number 1=2706170, Supplier 1=Farnell
U301: "Flash Memory, Floating Gate Architecture, Serial NOR, 256 Mbit, 32M x 8bit, SPI, WSOIC, 16 Pins", Manufacturer="Cypress - Infineon Technologies", Supplier Part Number 1=2768046, Manufacturer Part No=S25FL256LAGMFI003, Supplier 1=Farnell
Y300: library part Crystal_16MHz, "WE-XTAL Quartz Crystal, SMT, 12SMX, 16MHz, +/-30ppm", Frequency Stability=+/-50ppm, Frequency Tolerance=+/-30ppm, Load Capacitance=16pF, Manufacturer="Wurth Elektronik", Manufacturer Part Number=830026392, Operating Temperature="-20 to +70degC", ComponentLink1Description=Manufacturer, ComponentLink1URL=http://www.we-online.de, ComponentLink2Description=Datasheet, ComponentLink2URL=https://katalog.we-online.com/pbs/datasheet/830026392.pdf, Frequency=16MHz, Mounting Technology=SMT, Packaging="Tape and Reel", Published Date="July 2020", Size=12SMX

## Free pads (board coordinates)
  round 6 hole 3.5: 0(13,3) 0(13,58) 0(88,3) 0(88,58)

## Via types
v1: diameter 0.7, hole 0.35, Top Layer to Bottom Layer, tented both sides, 153 vias

## Nets (pads, with @x,y where several pads share a name; then routed paths per layer and width w, separated by ;. In a path a pad name is that pad's centre, name@x,y a point inside that pad or via, vN(x,y) a via of type N, cw(c..) or ccw(c..) an arc to the next point about the centre after c; other vN are vias at no path point)
3.3V: C102.1 C201.2 C206.2 C207.2 C302.2 C303.2 C304.2 C305.2 C307.2 P200.4 P300.2 R204.2 R205.2 R209.2 R210.2 R211.2 R213.2 R301.2 R305.2 U101.2 U101.4 U200.5 U300.17 U300.19 U300.26 U300.29 U300.40 U301.2 | length 223.2
  Top Layer w0.4: C302.2 40.35,23.6 40.8,23.6 41.6,22.8 41.6,21.9 42.3,21.2 U300.29 ; C303.2 40.314,25.736 40.935,25.736 41.169,25.502 41.169,25.14 41.173,25.136 41.173,24.782 42.053,23.902 42.326,23.629 43.321,23.629 U300.26 ; U300.19 47.4,29.716 47.634,29.95 49,29.95 ; U300.17 49,29.95 ; U300.40 49.8,15.1 50.884,14.016 50.884,13.066 C304.2 ; C305.2 50.05,30.9 49.7,30.55 49.6,30.55 49,29.95
  Top Layer w0.6: R205.2 34.1,11.95 34.35,12.2 34.35,12.3 35.496,13.446 43.95,13.446 v1(44,13.396) ; v1(38.6,30.1) 38.6,26.9 39.2,26.3 39.75,26.3 C303.2 C302.2 ; U301.2 39.175,43.112 40.187,42.1 42.95,42.1 C307.2 R305.2 43.1,39.95 43.35,39.7 43.35,39.6 44.2,38.75 44.2,32.527 44.3,32.427 v1(44.3,32.4) 44.35,32.45 50.05,32.45 ; R301.2 R213.2 52,10.2 v1(51,11.2) 50.95,11.25 C304.2 ; C305.2 50.05,32.45 ; v1(55.7,13.4) 56.4,14.1 56.4,17.5 57.073,18.173 60.627,18.173 60.65,18.15 61.15,17.65 61.15,16.325 C206.2 61.475,13.625 60.95,13.1 C207.2 60.95,11.55 v1(61,11.5) ; v1@58.3,33.2 50.8,33.2 50.05,32.45 ; v1(58.3,33.3) 58.319,33.319 59.532,33.319 63.64,37.427 69.2,37.427 69.373,37.6 v1(69.4,37.6) 69.4,38.45 68.95,38.9 C201.2 68.95,39.1 69.4,39.55 69.4,44.3 68.795,44.905 U200.5 ; v1(60.6,18.1) 62.55,20.05 R211.2 64.1,20.05 64.602,20.552 69.398,20.552 69.9,20.05 R210.2 R209.2 72.1,20.05 72.602,20.552 76.427,20.552 76.828,20.151 77.899,20.151 R204.2 ; v1(60.9,31.8) 60.9,26.462 62.381,24.981 ; v1(61.3,23.9) 62.381,24.981 ; P200.4 v1(70.7,17.5) ; U101.2 76,30 76.65,29.35 76.65,29.25 76.9,29 77.1,29 77.35,28.75 77.35,28.65 78.346,27.654 78.346,25.646 77.681,24.981 62.381,24.981
  Bottom Layer w0.6: v1(38.6,30.1) 38.6,30.3 40.7,32.4 v1(44.3,32.4) ; v1(44,13.396) 46.97,10.426 50.426,10.426 50.981,10.981 50.981,11.181 53.2,13.4 v1(55.7,13.4) 55.7,11.76 56.427,11.033 56.427,6.573 57.35,5.65 P300.2 ; v1(58.3,33.3) 59.4,33.3 v1(60.9,31.8) ; v1(60.6,18.1) 61.3,18.8 v1(61.3,23.9) ; v1(61,11.5) 64.7,11.5 v1(70.7,17.5)
5V: C101.2 C106.2 C107.1 C200.2 L100.2 R101.2 U101.3 U200.3 | length 68.9
  Top Layer w0.6: v1(71.241,34.869) 76.031,34.869 76.851,34.049 76.851,33.099 C101.2 ; v1(71.3,37.5) 71.3,38.75 70.8,39.25 70.8,39.601 70.7,39.701 70.7,43.284 71.051,43.635 U200.3 ; U101.3 75.6,32.3 76,32.7 76.75,32.7 C101.2 ; C107.1@81,19.9 80.7,19.6 80.6,19.6 79.6,18.6 79.6,10.9 82,8.5 88.2,8.5 90.4,10.7 92.65,10.7 93.55,11.6 93.65,11.6 93.95,11.9 R101.2 ; L100.2 81.05,14.425 C106.2 81.05,19.95 C107.1 81,23.772 79.73,25.042 79.073,25.699 79.073,32.1 78.223,32.95 C101.2
  Bottom Layer w0.6: v1(71.241,34.869) 71.241,34.896 71.3,34.955 v1(71.3,37.5)
5Vsec: C112.2 C113.1 C208.2 C209.2 L101.2 R104.2 U203.1 | length 153.5
  Top Layer w0.6: U203.1@8.92,16.5 8.92,47.23 10.19,48.5 10.19,48.879 10.689,49.377 10.689,49.489 16.15,54.95 C209.2 18.1,54.95 18.625,55.475 C208.2 25.625,55.475 28.6,52.5 28.6,48.4 29.5,47.5 44.2,47.5 45.5,46.2 45.5,42.5 47.1,40.9 57.872,40.9 60.272,38.5 v1(63.4,38.5) ; v1(66.3,35.596) 66.327,35.596 66.377,35.646 74.978,35.646 76.432,37.1 79.9,37.1 80.65,36.35 80.75,36.35 81,36.1 C113.1 ; L101.2 81.05,30.425 C112.2 81.05,35.95 C113.1 ; R104.2 93.95,27.9 93.7,27.65 93.6,27.65 92.65,26.7 91,26.7 88.9,24.6 81.2,24.6 79.8,26 79.8,34.7 81,35.9 C113.1
  Bottom Layer w0.6: v1(63.4,38.5) 63.419,38.481 63.719,38.481 66.281,35.919 66.281,35.615 v1(66.3,35.596)
CAN_+: J100.1 J200.6 J201.6 | length 44.3
  Top Layer w1: J201.6 41.587,54.038 41.587,53.705 45.793,49.5 v1(61.5,49.5) v1(70.7,49.5)
  Bottom Layer w0.6: J100.1 77,47
  Bottom Layer w1: v1(61.5,49.5) 61.5,54.065 J200.6 ; v1(70.7,49.5) 74.5,49.5 77,47
CAN_-: J101.1 J200.3 J201.3 | length 57.8
  Bottom Layer w0.6: J101.1 82,47.1
  Bottom Layer w1: J201.3 39.995,57.4 43.078,57.4 45.4,55.078 45.4,53.586 45.986,53 53.3,53 54.5,54.2 54.5,56.08 56.12,57.7 57.6,57.7 58.427,56.873 ; J200.3 58.427,55.918 58.427,56.873 ; 82,47.1 78.3,50.8 68.9,50.8 68.2,51.5 65.4,54.3 65.4,55.3 63,57.7 59.254,57.7 58.427,56.873
CAN_H: D200.2 J200.7 J201.7 L200.1 | length 61.1
  Top Layer w0.6: v1(47.2,43) 48.224,43 48.274,43.05 D200.2 53,43.05 L200.1
  Top Layer w1: J201.7 42.607,55.818 43.653,55.818 44.847,54.624 44.847,53.633 46.68,51.8 65.2,51.8 v1(65.3,51.9) 65.3,54.6 64.025,55.875 J200.7
  Bottom Layer w1: v1(47.2,43) 48.073,43.873 61.067,43.873 65.3,48.106 v1(65.3,51.9)
CAN_L: D200.1 J200.8 J201.8 L200.4 | length 51.7
  Top Layer w0.6: v1(47.2,45) 48.224,45 48.274,44.95 D200.1 53,44.95 L200.4
  Top Layer w1: J201.8 43.627,54.038 43.627,53.259 46.213,50.673 v1@63.6,50.673
  Bottom Layer w1: v1(47.2,45) 60.6,45 63.6,48 v1(63.6,50.6) 63.6,54.065 J200.8
CAN_RX: R202.2 U300.10 | length 34.2
  Top Layer w0.4: U300.10 56.1,25.2 57.1,26.2 57.1,29.255 64.118,36.273 74.718,36.273 76,37.555 76,42.05 75.45,42.6 75.45,42.7 75.1,43.05 R202.2
CAN_SHIELD: J200.Shell J201.Shell J202.1 | length 27.1
  Bottom Layer w0.6: J202.1 87,46.102 87,47.1
  Bottom Layer w1: J201.Shell@48.125,54.985 J200.Shell@51.875,54.985 ; J200.Shell@68.125,54.975 68.125,54.985 71.183,51.927 82.173,51.927 87,47.1
CAN_TX: R201.2 U300.11 | length 28.4
  Top Layer w0.4: U300.11 55.9,26 56.573,26.673 56.573,29.473 63.9,36.8 74.5,36.8 75,37.3 R201.2
DEBUG_RX: R304.1 U300.37 | length 10.6
  Top Layer w0.4: R304.1 42,9.4 47.4,14.8 U300.37
DEBUG_TX: R303.1 U300.38 | length 10.1
  Top Layer w0.4: R303.1 44,10.5 48.2,14.7 U300.38
FLASH_CS: R305.1 U300.20 U301.7 | length 25.7
  Top Layer w0.4: U301.7 32.825,43.275 33.4,42.7 38.2,42.7 42.9,38 43.1,38 43.1,32.213 46.6,28.713 U300.20
FLASH_MISO: U300.21 U301.8 | length 25.1
  Top Layer w0.4: U301.8 31.593,44.637 31.593,43.761 33.182,42.173 36.827,42.173 42.2,36.8 42.2,32.3 45.8,28.7 U300.21
FLASH_MOSI: U300.23 U301.15 | length 11.1
  Top Layer w0.4: U301.15 39.213,35.287 39.213,33.687 43.35,29.55 U300.23
FLASH_SCK: U300.22 U301.16 | length 9.6
  Top Layer w0.4: U301.16 40.445,33.2 44.971,28.674 44.971,27.679 U300.22
GND: C101.1 C102.2 C103.1 C104.2 C105.1 C106.1 C107.2 C109.1 C110.2 C111.1 C112.1 C113.2 C200.1 C201.1 C202.1 C203.1 C204.2 C205.1 C206.1 C207.1 C208.1 C209.1 C210.1 C300.1 C301.1 C302.1 C303.1 C304.1 C305.1 C306.1 C307.1 C308.1 D100.2 D101.2 D102.2 D200.3 D201.3 D201.4 J101.2 J202.2 P100.2 P200.6 P200.10 P300.3 R102.1 R105.1 S200.3 U100.2 U101.1 U102.2 U200.2 U200.8 U201.2 U202.2 U203.4 U300.6 U300.16 U300.30 U300.39 U301.10 Y300.2 Y300.4
  other v1: 80,1 19,2 80,2 19,4 62,5 62,6 62,7 36,8 39,8 80,8 58,9 80,9 49.604,9.487 46,10 59,10 2,11 41,11 60,11 82,11 88,11 89,11 99,11 48.988,11.452 1,12 57,12 100,12 90,13 90,14 90,15 28,16 30,16 32,16 34,16 38,16 40,16 42,16 44,16 28,18 28,20 41,20 50,20 52,20 28,22 46,22 82,23 83,23 84,23 28,24 90,24 92,24 94,24 96,24 46,25 50,25 52,25 28,26 74,26 75,26 76,26 82,26 89.492,26.954 88.37,26.967 28,28 96,28 30,29 32,29 34,29 36,29 54,29 59,29 60,29 90,29 78.25,29.5 40.104,29.612 54,30 90,30 96,30 78.25,30.5 54,31 75.5,31 90,31 78.25,31.5 96,32 64.75,34.75 58,35 46.5,35.5 29,36 58,37 72.423,37.637 73.764,37.637 32,38 34,38 46.5,38 65.648,38.866 79,39 81,39 83,39 88,39 91,39 93,39 95,39 97,39 61,41 60.1,41.584 61.701,41.695 48.485,41.807 42,46 43,46 68,46 70,46 72,46 47,47 1,49 100,49 2,50 99,50 16,52 24,52 12,53 16,53 24,53 29,54
LED_G: R207.2 U300.35 | length 17
  Top Layer w0.4: R207.2 32,13.2 32.873,14.073 44.573,14.073 45.8,15.3 U300.35
LED_R: R206.1 U300.34 | length 18.3
  Top Layer w0.4: R206.1 30,13.6 31,14.6 44.2,14.6 44.994,15.394 44.994,16.344 U300.34
M\C\L\R\: R302.1 U300.18 | length 20.5
  Top Layer w0.4: v1(47.1,12.5) 47.1,10.3 48,9.4 R302.1 ; v1(47.1,18) 48.2,19.1 U300.18
  Bottom Layer w0.4: v1(47.1,12.5) v1(47.1,18)
NetC100_1: C100.1 U100.1 | length 2.6
  Top Layer w0.6: C100.1 87.05,10.05 U100.1
NetC100_2: C100.2 D101.1 L100.1 U100.6
NetC108_1: C108.1 U102.1 | length 2.6
  Top Layer w0.6: C108.1 87.05,26.05 U102.1
NetC108_2: C108.2 D102.1 L101.1 U102.6
NetC202_2: C202.2 L200.2 R200.2 U200.7 | length 16.3
  Top Layer w0.6: L200.2 58.925,42.875 C202.2 59.05,40.75 60.3,39.5 61.55,39.5 62.7,40.65 R200.2@62.8,40.65 ; R200.2 63.05,40.9 63.3,40.65 63.4,40.65 64.15,39.9 65.2,39.9 65.223,39.923 65.727,39.923 66,40.196 66,41.8 66.565,42.365 U200.7
NetC203_2: C203.2 R200.1 R203.2 | length 4
  Top Layer w0.6: R203.2 C203.2 65,42.95 R200.1
NetC204_1: C204.1 L200.3 R203.1 U200.6 | length 14.9
  Top Layer w0.6: L200.3 58.875,45.125 C204.1 59,45.1 59.25,45.35 59.35,45.35 60.4,46.4 61.8,46.4 62.75,45.45 62.75,45.25 R203.1 63,45.1 63.25,45.35 63.35,45.35 64.3,46.3 65.6,46.3 66,45.9 66,44.1 66.465,43.635 U200.6
NetC205_2: C205.2 R205.1 R208.2 S200.2 | length 14.2
  Top Layer w0.4: S200.2 31.75,7.75 33.55,9.55 33.55,9.65 33.9,10 R205.1 34.1,10 34.45,10.35 34.45,10.4 35.55,11.5 35.55,11.6 35.9,11.95 C205.2 36.1,11.95 36.45,11.6 36.45,11.5 37.55,10.4 37.65,10.4 R208.2
NetC210_2: C210.2 P200.9 R213.1 R215.2 | length 19.8
  Top Layer w0.4: R213.1 53.95,6 R215.2 C210.2 58.05,6.05 62.9,10.9 62.9,14.8 64.2,16.1 P200.9
NetC300_2: C300.2 R300.1 U300.32 Y300.1 | length 17.9
  Top Layer w0.4: Y300.1 30.73,24.85 31.23,24.35 31.48,24.35 32.23,23.6 34.55,23.6 35.55,24.6 35.55,24.7 35.9,25.05 C300.2 R300.1 36.1,23 36.45,22.65 36.45,22.495 40.145,18.8 U300.32
NetC301_2: C301.2 R300.2 U300.33 Y300.3 | length 13.5
  Top Layer w0.4: Y300.3 35.95,18.9 C301.2 R300.2 37.15,21.05 40.2,18 U300.33
NetC306_2: C306.2 U300.7 | length 4.7
  Top Layer w0.4: U300.7 57.616,22.8 57.85,23.034 57.85,23.1 58.275,23.525 C306.2
NetC308_2: C308.2 P300.1 R301.1 R302.2 | length 15.2
  Top Layer w0.4: C308.2 R302.2 48.05,6 R301.1 50.1,6 50.45,5.65 50.45,5.55 51.2,4.8 58.09,4.8 P300.1
NetD201_1: D201.1 R206.2 | length 9.5
  Top Layer w0.4: D201.1 26.35,3.85 26.973,4.473 26.973,5.718 30,8.745 R206.2
NetD201_2: D201.2 R207.1 | length 12.1
  Top Layer w0.4: D201.2 26.45,2.15 27.5,3.2 27.5,5.5 31.55,9.55 31.55,9.65 31.9,10 R207.1
NetF100_1: F100.1 P100.1 | length 10.6
  Top Layer w2: P100.1 80.74,53.8 82.9,53.8 86.2,50.5 86.2,48.85 86.35,48.7 F100.1
NetF101_1: F101.1 J100.2 | length 6.8
  Top Layer w0.6: v1(77,41.2) 80.9,41.2 F101.1
  Bottom Layer w0.6: v1(77,41.2) J100.2
NetJ200_1: J200.1 J201.1 | length 27.3
  Bottom Layer w1: J201.1 35.3,54.745 35.3,53.1 36.527,51.873 53.767,51.873 55.627,53.733 55.627,55.072 J200.1
NetJ200_2: J200.2 J201.2 | length 23.2
  Top Layer w1: J201.2 41.245,50.3 v1(41.3,50.3)
  Bottom Layer w1: v1(41.3,50.3) 41.746,50.746 54.234,50.746 56.754,53.266 56.754,53.359 57.45,54.055 J200.2
NetJ200_4: J200.4 J201.4 | length 25
  Top Layer w1: J201.4 39.571,54.095 39.888,53.778 39.92,53.778 v1(44.149,49.549)
  Bottom Layer w1: v1(44.149,49.549) 57.049,49.549 59.49,51.99 J200.4
NetJ200_5: J200.5 J201.5 | length 27.4
  Top Layer w1: J201.5 42.035,57.4 43.665,57.4 45.532,55.532 45.974,55.091 45.974,54.1 47.074,53 53.1,53 54.5,54.4 54.5,56 56.2,57.7 59.9,57.7 60.51,57.09 J200.5
NetP200_2: P200.2 U201.5 | length 4.4
  Top Layer w0.4: P200.2 73.05,16.25 73.05,16.75 74.9,18.6 74.9,19.525 U201.5
NetP200_3: P200.3 U201.4 | length 4.5
  Top Layer w0.4: P200.3 71.95,16.25 71.95,16.85 73.963,18.863 73.963,19.538 U201.4
NetP200_5: P200.5 U202.5 | length 5.1
  Top Layer w0.4: U202.5 67.1,19.525 67.1,19 67.9,18.2 68.8,18.2 69.6,17.4 P200.5
NetP200_7: P200.7 U202.4 | length 4.1
  Top Layer w0.4: U202.4 66.15,19.525 66.15,18.95 67.4,17.7 P200.7
NetP300_7: P300.7 R303.2 | length 3.3
  Top Layer w0.4: R303.2 44,3.834 44.65,3.185 P300.7
NetP300_8: P300.8 R304.2 | length 3.1
  Top Layer w0.4: R304.2 42,3.11 P300.8
NetR100_1: R100.1 U100.4 | length 3.4
  Top Layer w0.6: U100.4 88.95,15.575 89.15,15.575 89.575,16 R100.1
NetR101_1: R101.1 R102.2 U100.3 | length 6.3
  Top Layer w0.6: U100.3 88.95,12.425 89.15,12.425 89.575,12 R101.1 92,12.1 92.25,12.35 92.3,12.35 93.6,13.65 93.7,13.65 93.95,13.9 R102.2
NetR103_1: R103.1 U102.4 | length 3.4
  Top Layer w0.6: U102.4 88.95,31.575 89.15,31.575 89.575,32 R103.1
NetR104_1: R104.1 R105.2 U102.3 | length 6.3
  Top Layer w0.6: U102.3 88.95,28.425 89.15,28.425 89.575,28 R104.1 92,28.1 92.25,28.35 92.3,28.35 93.6,29.65 93.7,29.65 93.95,29.9 R105.2
NetR201_1: R201.1 U200.1 | length 2.6
  Top Layer w0.6: U200.1 73.2,41.095 73.295,41 R201.1
NetR202_1: R202.1 U200.4 | length 2.6
  Top Layer w0.6: U200.4 74.905,44.905 R202.1
NetR204_1: R204.1 U201.1 U300.5 | length 28.8
  Top Layer w0.4: U300.5 60.009,21.2 63.163,24.354 77.046,24.354 78,23.4 R204.1 77.9,22.1 76.05,22.1 75.95,22.2 U201.1
NetR208_1: R208.1 U300.36 | length 11.3
  Top Layer w0.4: R208.1 43.855,12 46.6,14.745 U300.36
NetR209_1: R209.1 U201.3 U300.4 | length 22.3
  Top Layer w0.4: U300.4 59.955,20.4 63.382,23.827 71.073,23.827 72,22.9 72,22.1 72.1,22 72.2,22.1 73.95,22.1 74.05,22.2 U201.3
NetR210_1: R210.1 U202.1 U300.3 | length 20.3
  Top Layer w0.4: U300.3 59.9,19.6 63.6,23.3 69.6,23.3 70,22.9 70,22.1 R210.1 69.9,22.1 68.05,22.1 67.95,22.2 U202.1
NetR211_1: R211.1 U202.3 U300.2 | length 13
  Top Layer w0.4: U300.2 59.9,18.8 62.75,21.65 63.65,21.65 64.1,22.1 65.95,22.1 66.05,22.2 U202.3
NetR212_1: R212.1 U300.25 | length 15.8
  Top Layer w0.4: R212.1 40.355,31 41.696,29.659 41.696,25.359 41.7,25.355 41.7,25 42.271,24.429 43.321,24.429 U300.25
NetR212_2: R212.2 U203.2 | length 47.6
  Top Layer w0.6: U203.2@12.73,48.5 12.73,38.47 v1(18.4,32.8) ; U203.2@16.54,16.5 16.54,27.64 v1(20.1,31.2) 30.85,31.2 R212.2
  Bottom Layer w0.6: v1(18.4,32.8) 20,31.2 v1(20.1,31.2)
NetR214_1: R214.1 U300.24 | length 16.1
  Top Layer w0.4: R214.1 39.1,33 42.223,29.877 42.223,25.751 42.227,25.747 42.227,25.508 42.506,25.229 43.321,25.229 U300.24
NetR214_2: R214.2 U203.3 | length 47.4
  Top Layer w0.6: U203.3@14,16.5 14,26.6 20.4,33 ; U203.3@15.27,48.5 15.27,38.13 20.4,33 ; R214.2 20.4,33
NetR215_1: R215.1 U300.43 | length 9.1
  Top Layer w0.4: U300.43 52.2,13.4 54,11.6 R215.1
PGEC: P300.5 U300.1 | length 17.3
  Top Layer w0.4: U300.1 54.65,10.75 v1(55,10.4)
  Bottom Layer w0.4: P300.5 55,8.27 v1(55,10.4)
PGED: P300.4 U300.44 | length 16
  Top Layer w0.4: U300.44 53,13.5 53.8,12.7 53.873,12.7 v1(53.973,12.6)
  Bottom Layer w0.4: P300.4 55.8,6.53 55.8,10.773 v1(53.973,12.6)
Vin: C103.2 C104.1 C105.2 C109.2 C110.1 C111.2 D100.1 F100.2 F101.2 R100.2 R103.2 U100.5 U102.5 | length 86.9
  Top Layer w0.6: U100.5 88,18.05 88.65,18.7 88.65,18.8 88.9,19.05 C105.2 89.1,19.05 89.625,18.525 C104.1 92.699,18.525 93.024,18.2 93.024,17.501 93.7,16.825 93.7,16.25 R100.2 ; U102.5 88,34.05 88.65,34.7 88.65,34.8 88.9,35.05 C111.2 89.1,35.05 89.625,34.525 C110.1 92.699,34.525 93.024,34.2 93.024,33.501 93.7,32.825 93.7,32.25 R103.2
  Top Layer w1: F101.2 82.014,48.7 82.664,48.05 82.664,46.636 85.964,43.336 85.964,41.95 86.614,41.3 F100.2 89.611,41.3 90.261,41.95 90.261,43.111 93.95,46.8 93.95,47.125 94.675,47.85 D100.1 95.325,47.85 96.05,47.125 96.05,46.8 98.9,43.95 98.9,35.3 98.125,34.525 ; C110.1 C109.2 98.125,34.525 ; C104.1@92.699,18.525 C103.2 96.125,18.65 97.15,18.65 98.125,19.625 98.125,34.525
pads on no net: J200.MH1 J200.MH2 J201.MH1 J201.MH2 P200.0 P200.1 P200.8 P300.6 S200.1 S200.4 U201.6 U202.6 U203.0 U203.5 U300.8 U300.9 U300.12 U300.13 U300.14 U300.15 U300.27 U300.28 U300.31 U300.41 U300.42 U301.1 U301.3 U301.4 U301.5 U301.6 U301.9 U301.11 U301.12 U301.13 U301.14

## Polygon pours and split planes (outlines as drawn)
3.3V on Top Layer "REG_3v3" (solid, remove dead copper, pour order 2): 73,26 73,28 75,28 75,28.5 75,30 74,31 74,34 63,34 62,33 62,27 63,26
GND on Top Layer "GND" (solid, remove dead copper, pour order 6): 10,2 10,5 ccw(c5,5) 5,10 2,10 cw(c2,12) 0,12 0,49 cw(c2,49) 2,51 5,51 ccw(c5,56) 10,56 10,59 cw(c12,59) 12,61 89,61 cw(c89,59) 91,59 91,56 ccw(c96,56) 96,51 99,51 cw(c99,49) 101,49 101,12 cw(c99,12) 99,10 96,10 ccw(c96,5) 91,5 91,2 cw(c89,2) 89,0 12,0 cw(c12,2)
CAN_SHIELD on Top Layer "CAN_SHIELD" (solid, remove dead copper, pour order 4): 30,61 30,48 70,48 70,61
NetC100_2 on Top Layer "SW_5v" (solid, remove dead copper, pour order 1): 83,9 83,17 85,17 85,20 87.5,20 87.5,9
NetC108_2 on Top Layer "SW_5Vsec" (solid, remove dead copper, pour order 0): 83,25 83,33 85,33 85,36 87.5,36 87.5,25
GND on Bottom Layer "GND" (solid, remove dead copper, pour order 5): 10,2 10,5 ccw(c5,5) 5,10 2,10 cw(c2,12) 0,12 0,49 cw(c2,49) 2,51 5,51 ccw(c5,56) 10,56 10,59 cw(c12,59) 12,61 89,61 cw(c89,59) 91,59 91,56 ccw(c96,56) 96,51 99,51 cw(c99,49) 101,49 101,12 cw(c99,12) 99,10 96,10 ccw(c96,5) 91,5 91,2 cw(c89,2) 89,0 12,0 cw(c12,2)
CAN_SHIELD on Bottom Layer "CAN_SHIELD" (solid, remove dead copper, pour order 3): 30,61 30,48 70,48 70,61

## Other copper
Top Layer:
  text "Logo's  / Via 3v3 (69.4 37.6) kan weg?+ / test pads voltages? / +- bij voeding / hardware nummer / 3hoekje bij programmer / soldert jumper functies en nummers / Canbus shield en - andere kant van connecotor langs. op bottom, betere ground / Wit blokje dicht op condensator C208" at 124,67.25 h1.52

## Silkscreen, mask and mechanical layers (free items; w line width, h text height)
Top Overlay:
  rectangle: 17,56 29,61
Board Outline:
  the board outline again, w0.2

## Text inside footprints (layer, text, board x,y; h text height)
P300: Top Overlay "1" at 60.01,1.3 h1.02 r180; Top Overlay "8" at 42.49,1.3 h1.02 r180